# Altium PCB FLOLED-BASE.PcbDoc
Units mm, origin at the board's own origin, x right, y up, seen from the top; angles counter-clockwise.
Board outline 40 x 40 mm, 2 copper layers (Top Layer, Bottom Layer); 13 components, 9 nets, 39 pads, 4 vias.
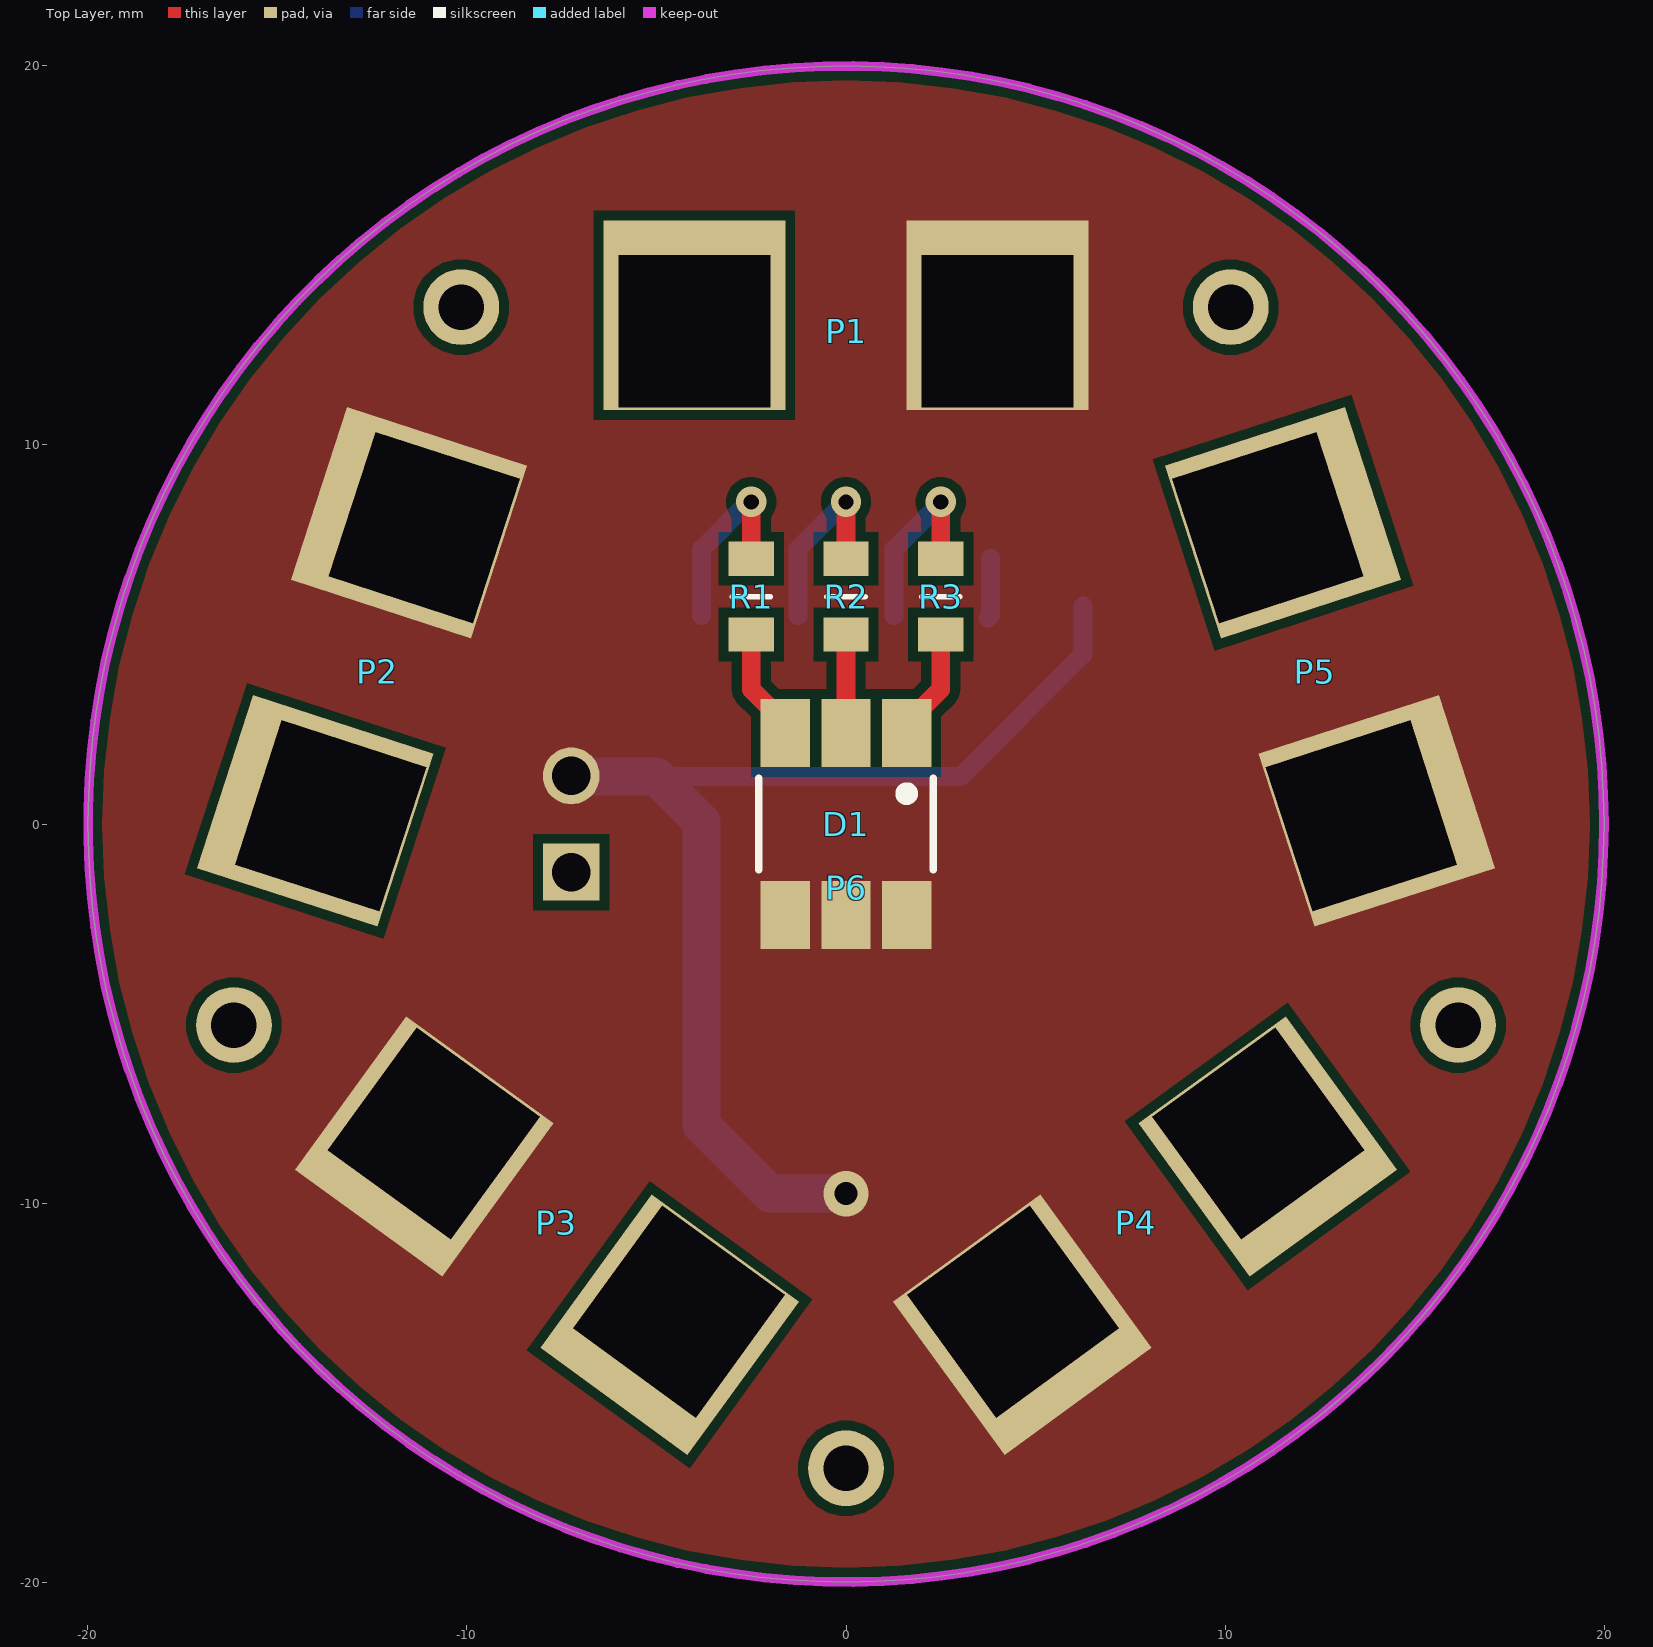
[diagram p0: Top Layer view]
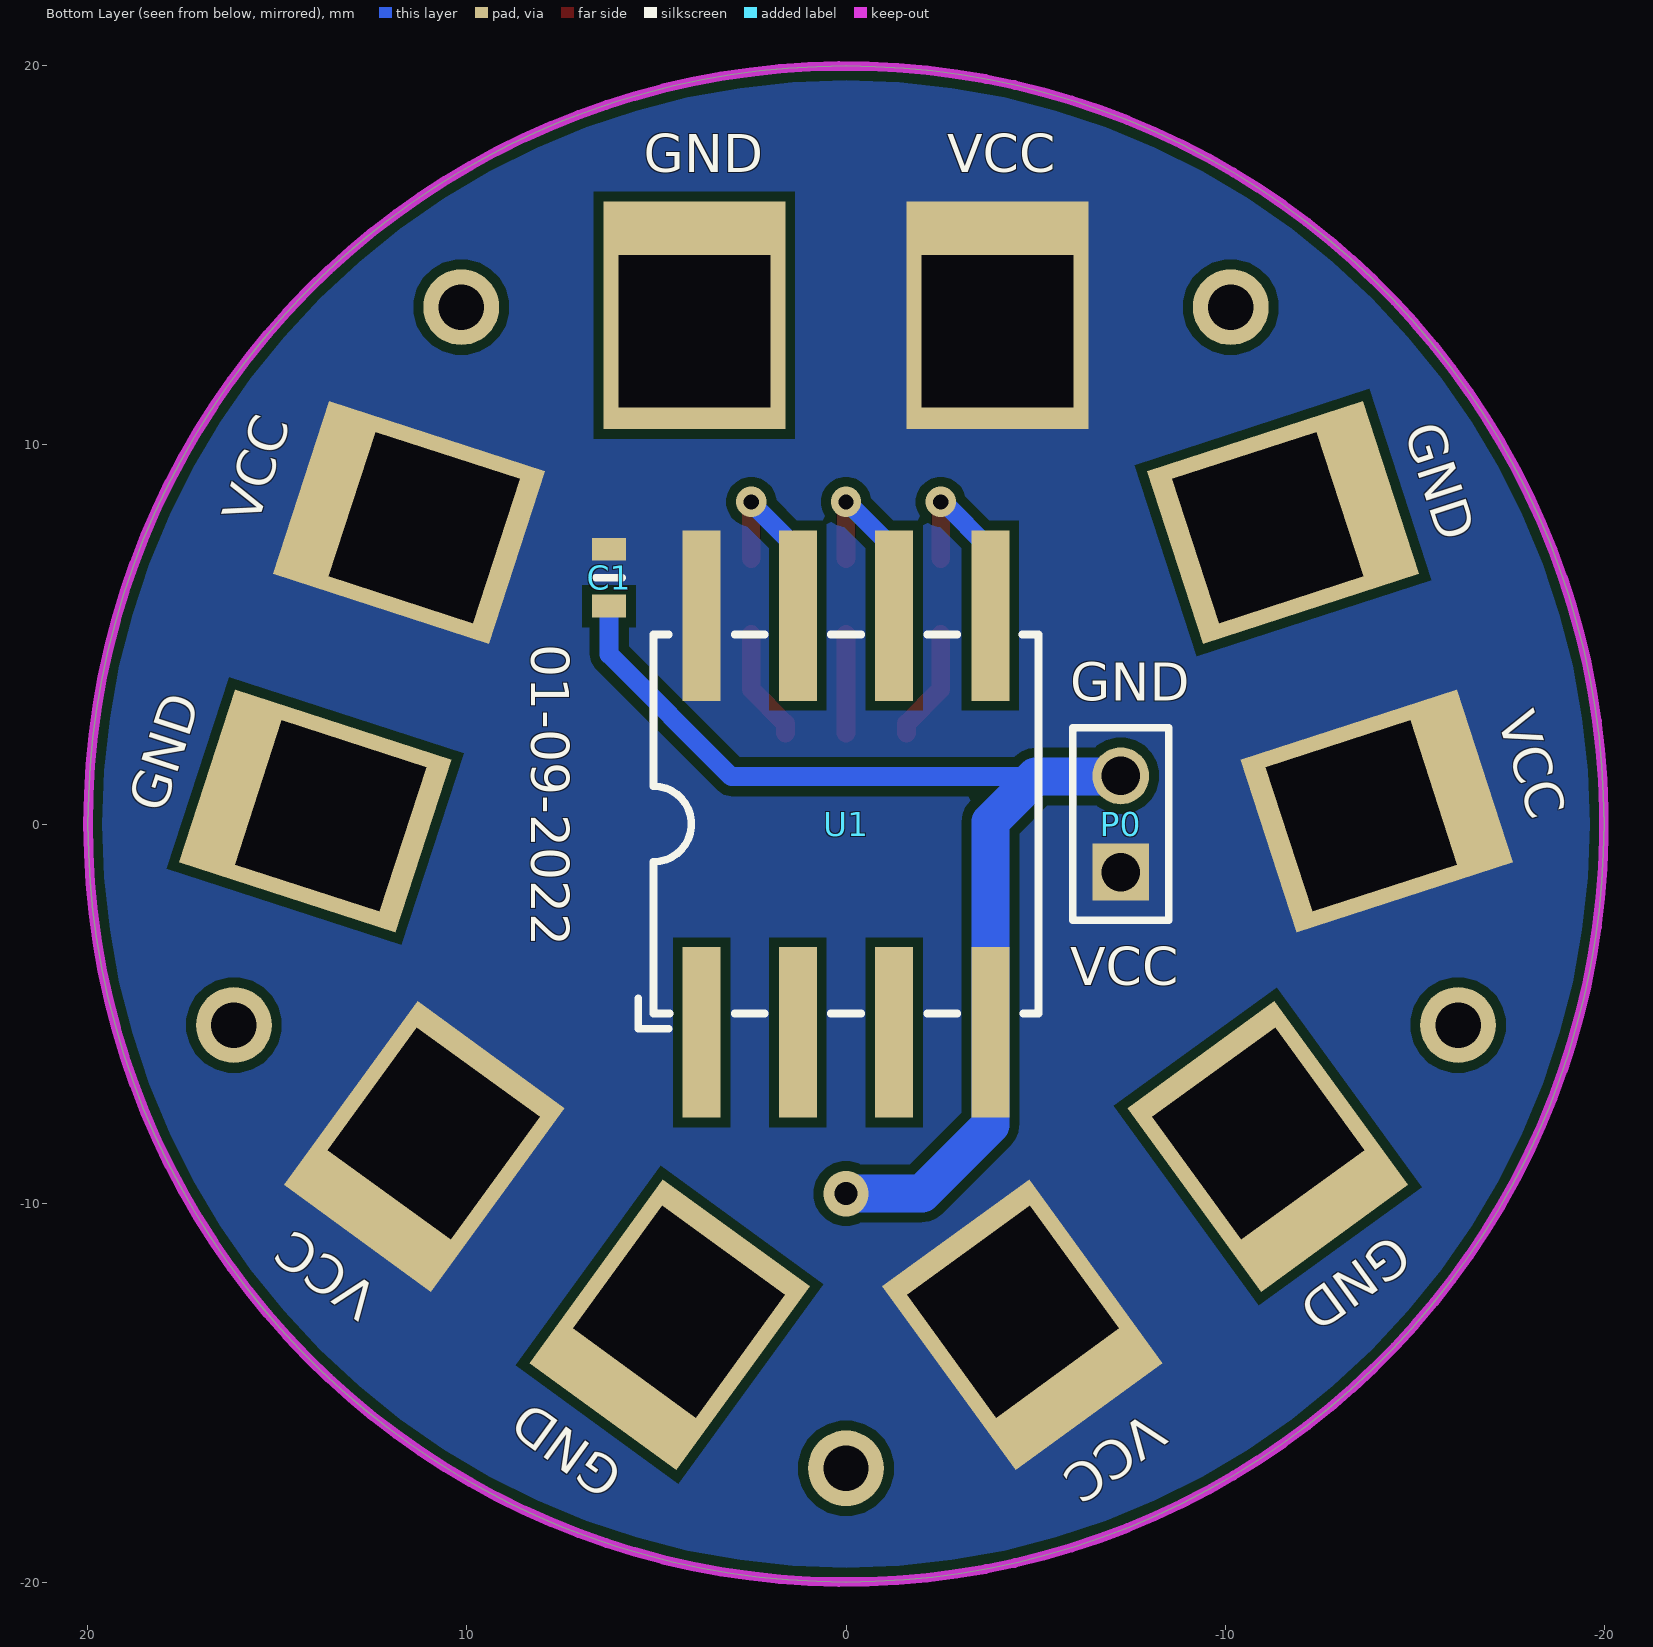
[diagram p1: Bottom Layer view, seen from below]

## Layer stack, top to bottom
Top Solder: solder mask 0.0102, Solder Resist, Dk 3.5
Top Layer: signal copper 0.0356
Dielectric 1: dielectric 0.32, FR-4, Dk 4.8
Bottom Layer: signal copper 0.0356
Bottom Solder: solder mask 0.0102, Solder Resist, Dk 3.5

## Board outline
-20,0 ccw(c0,0) 0,-20 ccw(c0,0) 20,0 ccw(c0,0) 0,20 ccw(c0,0)

## Design rules (kind name [scope] priority, off if disabled: settings)
Clearance [All] p1: gap=0.254 ignorepadtopadclearanceinfootprint=FALSE except(0: Arc-Hole Track-Hole SMDPad-Hole THPad-Hole Via-Hole Fill-Hole Poly-Hole Region-Hole Text-Hole)
HoleSize [All] p1: absolutevalues=TRUE maxlimit=5 minlimit=0.025 maxpercent=80.000 minpercent=20.000
MinimumSolderMaskSliver [All] p1: minsoldermaskwidth=0.2
PlaneClearance [All] p1: clearance=0.5
PolygonConnect [All] p1: connectstyle=Direct reliefconductorwidth=0.254 reliefentries=4 polygonreliefangle="90 Angle" airgapwidth=0.254
RoutingVias [All] p1: holewidth=0.711 width=1.27 viastyle="Through Hole" minholewidth=0.711 minwidth=1.27 maxholewidth=0.711 maxwidth=1.27
SilkToSolderMaskClearance [IsPad] p1: minsilkscreentomaskgap=0.2 clearancetoexposedcopper=TRUE
SolderMaskExpansion [All] p1: expansion=0.102 istentingtop=FALSE
Width [All] p1: maxlimit=1 minlimit=0.2 preferedwidth=0.254
26 further rules are at their usual default settings.

## Components (designator, comment, footprint, x,y, rotation, side; value= is the part's Value field where it differs from the comment)
C1 "Capacitor" 0603C 6.25,6.5 r90 bottom value=1u
D1 "LED-RGB" 5050-RGB 0,0 r270 top
P0 "2Px2.54mm" 2P-2.54mm -7.25,0 r90 bottom
P1 "petal connector" "FLOWER PETAL CONNECTORS" 0,0 r0 top locked
P2 "petal connector" "FLOWER PETAL CONNECTORS" 0,0 r72 top locked
P3 "petal connector" "FLOWER PETAL CONNECTORS" 0,0 r144 top locked
P4 "petal connector" "FLOWER PETAL CONNECTORS" 0,0 r216 top locked
P5 "petal connector" "FLOWER PETAL CONNECTORS" 0,0 r288 top locked
P6 "flower stem" "FLOWER STEM" 0,0 r0 top locked
R1 "Resistor" 0805R -2.5,6 r270 top value=100R
R2 "Resistor" 0805R 0,6 r270 top value=100R
R3 "Resistor" 0805R 2.5,6 r270 top value=100R
U1 "ATtiny13A-5" "DIP-8 - SMD" 0,0 r180 bottom value=13A

## Footprints (in the part's own frame and the unit in brackets; to place one, negate y for a bottom-side part, rotate by r counter-clockwise, add the part's x,y. Pads: shape width x height; smd on the part's side, far side on the other; paste and mask are expansions set on the pad)
2P-2.54mm [mm] "2-pin 2.54mm thru hole general footprint"
  rect 1.5x1.5 hole 1.02: 1(-1.27,0)
  round 1.5 hole 1.02: 2(1.27,0)
  silkscreen extent -2.54,-1.27 2.54,1.27
0603C [mm] "0603/1608 SMD general footprint"
  rect 0.6x0.9 smd mask+0.05: 1(-0.75,0) 2(0.75,0)
  silkscreen extent 0,-0.35 0,0.35, body extent -0.85,-0.45 0.85,0.45, height 0.9
0805R [mm] "0603/1608 SMD LED general footprint"
  rect 0.9x1.2 smd mask+0.05: 1(-1,0) 2(1,0)
  silkscreen extent 0,-0.5 0,0.5, body extent -1,-0.63 1,0.63, height 0.6
5050-RGB [mm]
  rect 1.8x1.3 smd mask+0.05: 1(-2.4,1.6) 2(2.4,1.6) 3(-2.4,0) 4(2.4,0) 5(-2.4,-1.6) 6(2.4,-1.6)
  silkscreen extent -1.2,-2.3 1.2,2.3, body extent -2.7,-2.5 2.7,2.5, height 1.6
"DIP-8 - SMD" [mm] "through hole DIP-8 2.54mm"
  rect 1x4.5 smd mask+0.05: 1(-3.81,-5.5) 2(-1.27,-5.5) 3(1.27,-5.5) 4(3.81,-5.5) 5(3.81,5.5) 6(1.27,5.5) 7(-1.27,5.5) 8(-3.81,5.5)
  silkscreen extent -5.48,-5.4 5.08,5, body extent -5.08,-5.08 5.08,5.08, height 9.48
"FLOWER PETAL CONNECTORS" [mm]
  rect 4.8x5 / inner rect 6.5x4.882 / far side rect 4.8x6 hole 4 square copper offset 0,0.425 mask+0.05: 1(-4,13) 2(4,13)
"FLOWER STEM" [mm]
  round 2 hole 1.2 mask+0.05: 1(10.151,13.637) 2(-10.151,13.637) 3(-16.151,-5.306) 4(0,-17) 5(16.151,-5.306)

## Part data
C1: "Capacitor 1uF"
P0: library part "2-pins Header", "General 2-pin connection"
P1 P2 P3 P4 P5: library part "2-pins Header", "Holes for flower petal PCB"
P6: library part "5-pins Header", "Holes for flower stem rods"
R1 R2 R3: library part RES, "Resistor 100Ω"
U1: "tiny AVR 8-pin microcontroller"

## Via types
v1: diameter 0.8, hole 0.4, Top Layer to Bottom Layer, tented both sides, 3 vias
v2: diameter 1.2, hole 0.6, Top Layer to Bottom Layer, tented both sides, 1 vias

## Nets (pads, with @x,y where several pads share a name; then routed paths per layer and width w, separated by ;. In a path a pad name is that pad's centre, name@x,y a point inside that pad or via, vN(x,y) a via of type N, cw(c..) or ccw(c..) an arc to the next point about the centre after c; other vN are vias at no path point)
GND: C1.1 D1.2 D1.4 D1.6 P0.2 P1.2 P2.2 P3.2 P4.2 P5.2 U1.4 | length 30.4
  Bottom Layer w0.5: -5,1.25 3.023,1.25 6.25,4.477 C1.1
  Bottom Layer w1: P0.2 -7.23,1.25 -5,1.25 -3.81,0.06 -3.81,-7.94 -2,-9.75 v2(0,-9.75)
MISO: R2.1 U1.6 | length 5
  Top Layer w0.5: R2.1 v1(0,8.5)
  Bottom Layer w0.5: U1.6 -1.27,7.25 -0.02,8.5 v1(0,8.5)
MOSI: R1.1 U1.5 | length 5.1
  Top Layer w0.5: R1.1 v1(-2.5,8.5)
  Bottom Layer w0.5: U1.5 -3.81,7.25 -2.56,8.5 v1(-2.5,8.5)
PB0: D1.5 R1.2 | length 3
  Top Layer w0.5: R1.2 -2.5,3.55 -1.6,2.65 D1.5
PB1: D1.3 R2.2 | length 2.6
  Top Layer w0.5: D1.3 R2.2
PB2: D1.1 R3.2 | length 3
  Top Layer w0.5: D1.1 1.6,2.65 2.5,3.55 R3.2
RST: U1.1
SCK: R3.1 U1.7 | length 5
  Top Layer w0.5: R3.1 v1(2.5,8.5)
  Bottom Layer w0.5: U1.7 1.27,7.25 2.5,8.48 v1(2.5,8.5)
VCC: C1.2 P0.1 P1.1 P2.1 P3.1 P4.1 P5.1 U1.8 | length 1.6
  Bottom Layer w0.5: U1.8@3.75,5.44 U1.8 U1.8@3.81,7
pads on no net: P6.1 P6.2 P6.3 P6.4 P6.5 U1.2 U1.3

## Polygon pours and split planes (outlines as drawn)
GND on Top Layer "BOTTOMGND" (solid, remove dead copper, pour order 0): -20,0 ccw(c0,0) 0,-20 ccw(c0,0) 20,0 ccw(c0,0) 0,20 ccw(c0,0)
VCC on Bottom Layer "BOTTOMGND" (solid, remove dead copper, pour order 1): -20,0 ccw(c0,0) 0,-20 ccw(c0,0) 20,0 ccw(c0,0) 0,20 ccw(c0,0)

## Keep-outs
Keep-Out Layer:
  circle w0.254: c0,0 r20

## Silkscreen, mask and mechanical layers (free items; w line width, h text height)
Bottom Overlay:
  text "01-09-2022" at 8.3,4.748 h1 r90
  text "GND" at -5.917,3.25 h1
  text "VCC" at -5.917,-4.25 h1

## Text inside footprints (layer, text, board x,y; h text height)
P1: Bottom Overlay "GND" at 5.333,17.2 h1; Bottom Overlay "VCC" at -2.667,17.2 h1
P2: Bottom Overlay "GND" at -14.71,10.387 h1 r72; Bottom Overlay "VCC" at -17.182,2.779 h1 r72
P3: Bottom Overlay "GND" at -14.424,-10.78 h1 r144; Bottom Overlay "VCC" at -7.952,-15.483 h1 r144
P4: Bottom Overlay "GND" at 5.795,-17.05 h1 r216; Bottom Overlay "VCC" at 12.268,-12.347 h1 r216
P5: Bottom Overlay "GND" at 18.006,0.243 h1 r288; Bottom Overlay "VCC" at 15.534,7.852 h1 r288